# Altium PCB Buck_Converter_PCB_2.PcbDoc
Units mm, origin at the board's own origin, x right, y up, seen from the top; angles counter-clockwise.
Board outline 150 x 100 mm, 2 copper layers (Top Layer, Bottom Layer); 59 components, 30 nets, 152 pads, 0 vias.
Unrouted connection lines stored in the file: 104.
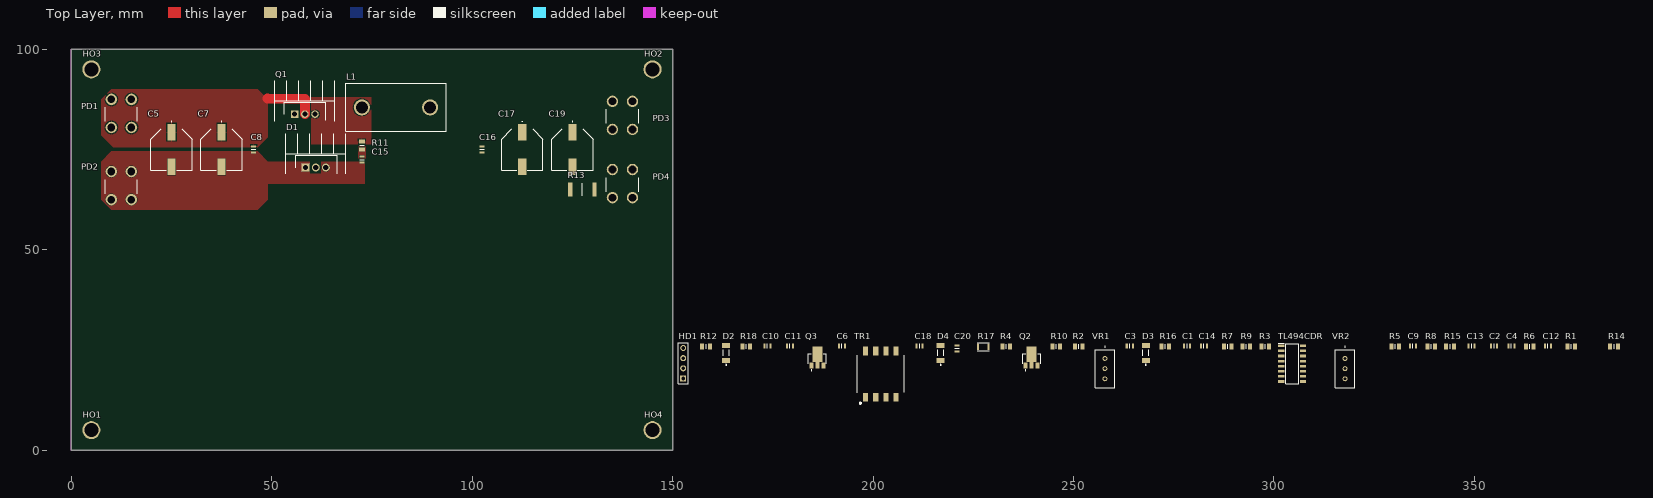
[diagram p0: Top Layer view]
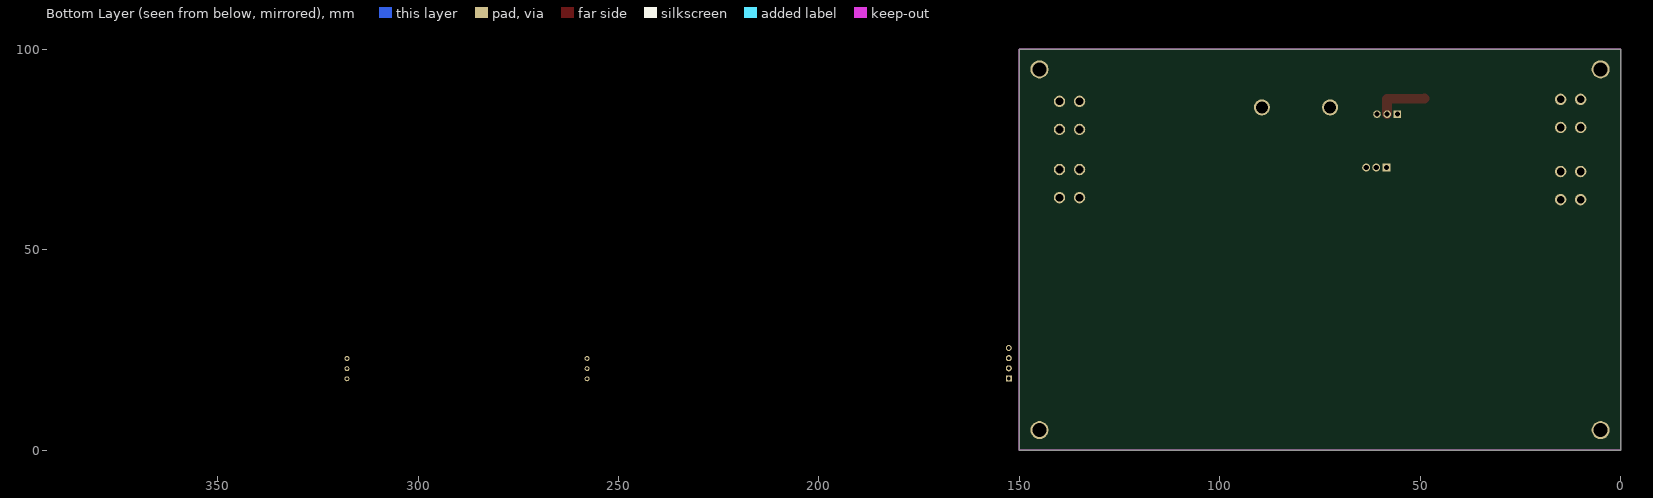
[diagram p1: Bottom Layer view, seen from below]

## Layer stack, top to bottom
Top Solder: solder mask 0.0102, Solder Resist, Dk 3.5
Top Layer: signal copper 0.0356
Dielectric 1: dielectric 0.32, FR-4, Dk 4.8
Bottom Layer: signal copper 0.0356
Bottom Solder: solder mask 0.0102, Solder Resist, Dk 3.5

## Board outline
0,0 150,0 150,100 0,100

## Design rules (kind name [scope] priority, off if disabled: settings)
Clearance [All] p1: gap=0.01
ComponentClearance [All] p1: gap=0.01 collisioncheckmode=3 verticalgap=0.254 showdistances=FALSE
PolygonConnect [All] p1: connectstyle=Direct reliefconductorwidth=0.254 reliefentries=4 polygonreliefangle="90 Angle" airgapwidth=0.254
RoutingVias [All] p1: holewidth=0.711 width=1.27 viastyle="Through Hole" minholewidth=0.711 minwidth=1.27 maxholewidth=0.711 maxwidth=1.27
SolderMaskExpansion [All] p1: expansion=0.102
UnpouredPolygon [All] p1: allowunpoured=TRUE allowshelved=TRUE
Width [All] p1: maxlimit=2.5 minlimit=0.254 preferedwidth=0.254
28 further rules are at their usual default settings.

## Components (designator, comment, footprint, x,y, rotation, side; value= is the part's Value field where it differs from the comment)
C1 "1uF" Capacitors_SMD_0805 278.345,25.973 r0 top
C2 "150pF" Capacitors_SMD_0805 354.945,25.973 r0 top
C3 "1nF" Capacitors_SMD_0805 264.045,25.973 r0 top
C4 "100nF" Capacitors_SMD_0805 359.245,25.973 r0 top
C5 "330uf" Capacitors_SMD_D10 25,75 r270 top
C6 "1uF" Capacitors_SMD_0805 192.246,25.973 r0 top
C7 "330uf" Capacitors_SMD_D10 37.5,75 r270 top
C8 "100nF" Capacitors_SMD_0805 45.5,75 r270 top
C9 "1nF" Capacitors_SMD_0805 334.645,25.973 r0 top
C10 "1uF" Capacitors_SMD_0805 173.646,25.973 r0 top
C11 "100nF" Capacitors_SMD_0805 179.246,25.973 r0 top
C12 "100nF" Capacitors_SMD_0805 368.345,25.973 r0 top
C13 "680pF" Capacitors_SMD_0805 349.345,25.973 r0 top
C14 "100nF" Capacitors_SMD_0805 282.545,25.973 r0 top
C15 "1nF" Capacitors_SMD_0805 72.5,72.5 r270 top
C16 "100nF" Capacitors_SMD_0805 102.5,75 r90 top
C17 "330uF" Capacitors_SMD_D10 112.5,75 r270 top
C18 "100nF" Capacitors_SMD_0805 211.646,25.973 r0 top
C19 "330uF" Capacitors_SMD_D10 125,75 r270 top
C20 "100nF" Capacitors_SMD_0805 220.946,25.373 r90 top
D1 "STPS20H100C" TO-220_Diode 61,70.5 r0 top
D2 "1N4148" 1N4148 163.346,24.273 r90 top
D3 "1N4148" 1N4148 268.045,24.273 r90 top
D4 "1N4148" 1N4148 216.846,24.273 r90 top
HD1 "Header 4" HDR1X4 152.646,17.873 r90 top
HO1 "HOLE" Hole 5,5 r0 top
HO2 "HOLE" Hole 145,95 r0 top
HO3 "HOLE" Hole 5,95 r0 top
HO4 "HOLE" Hole 145,5 r0 top
L1 "Inductor" Inductor 81,85.5 r0 top
PD1 "Terminal" Terminal 10,80.5 r0 top
PD2 "Terminal" Terminal 10,62.5 r0 top
PD3 "Terminal" Terminal 135,80 r0 top
PD4 "Terminal" Terminal 135,63 r0 top
Q1 "N-MOSFET" TO-220)N-MOSFET 58.26,83.8 r0 top
Q2 "2SCR552P" 2SCR552P 239.545,23.073 r0 top
Q3 "2SAR552P" 2SAR552P 186.146,23.073 r0 top
R1 "0R" RESISTOR_SMD_0805 374.145,25.873 r0 top
R2 "1K" RESISTOR_SMD_0805 251.345,25.873 r0 top
R3 "3K" RESISTOR_SMD_0805 297.845,25.873 r0 top
R4 "10K" RESISTOR_SMD_0805 233.245,25.873 r0 top
R5 "20K" RESISTOR_SMD_0805 330.245,25.873 r0 top
R6 "1K" RESISTOR_SMD_0805 363.845,25.873 r0 top
R7 "24K" RESISTOR_SMD_0805 288.445,25.873 r0 top
R8 "10K" RESISTOR_SMD_0805 339.245,25.873 r0 top
R9 "22R" RESISTOR_SMD_0805 293.145,25.873 r0 top
R10 "22R" RESISTOR_SMD_0805 245.745,25.873 r0 top
R11 "10R" RESISTOR_SMD_0805 72.5,76 r90 top
R12 "1K" RESISTOR_SMD_0805 158.346,25.873 r0 top
R13 "0R01" RESISTOR_SMD_2512 127.5,65 r0 top
R14 "15K" RESISTOR_SMD_0805 384.845,25.873 r0 top
R15 "1K5" RESISTOR_SMD_0805 343.945,25.873 r0 top
R16 "4R7" RESISTOR_SMD_0805 272.945,25.873 r0 top
R17 "4R7" RESISTOR_SMD_1206 227.545,25.773 r0 top
R18 "10K" RESISTOR_SMD_0805 168.346,25.873 r0 top
TL494CDR "TL494CDR" TL494CDR 304.545,21.573 r0 top
TR1 "B78307A2276A003" B78307A2276A003 201.946,18.973 r0 top
VR1 "5K" Baoter_3296 257.845,22.873 r90 top
VR2 "5K" Baoter_3296 317.745,22.873 r90 top

## Footprints (in the part's own frame and the unit in brackets; to place one, negate y for a bottom-side part, rotate by r counter-clockwise, add the part's x,y. Pads: shape width x height; smd on the part's side, far side on the other; paste and mask are expansions set on the pad)
1N4148 [mm]
  rect 1.25x2 smd: A(1.875,0) K(-1.875,0)
  silkscreen extent -3.12,-0.75 0.75,0.75, body extent -1.85,-0.8 1.85,0.8, height 1.6
2SAR552P [mm]
  rect 1x1.5 smd: 1(-1.5,-2) 3(1.5,-2)
  rect 1x1.7 smd: 2(0,-1.9)
  rect 2.5x3.8 smd: 2(0,0.85)
  silkscreen extent -2.25,-3.27 2.25,0.92, body extent -2.27,-2.27 2.27,1.73, height 1.6
2SCR552P [mm]
  rect 1x1.5 smd: 1(-1.5,-2) 3(1.5,-2)
  rect 1x1.7 smd: 2(0,-1.9)
  rect 2.5x3.8 smd: 2(0,0.85)
  silkscreen extent -2.25,-3.27 2.25,0.92, body extent -2.27,-2.27 2.27,1.73, height 1.6
B78307A2276A003 [mm]
  rect 1.3x2.21 smd: 1(-3.81,-5.77) 2(-1.27,-5.77) 3(1.27,-5.77) 4(3.81,-5.77) 5(3.81,5.77) 6(1.27,5.77) 7(-1.27,5.77) 8(-3.81,5.77)
  silkscreen extent -5.85,-7.3 5.85,4.65, body extent -5.94,-6.79 5.76,6.37, height 11.35
Baoter_3296 [mm]
  round 1.217 hole 0.71: 1(0,0) 2(-2.54,0) 3(-5.08,0)
  silkscreen extent -7.3,-2.41 3,2.42
Capacitors_SMD_0805 [mm]
  rect 0.5x1.25 smd: 1(-0.75,0) 2(0.75,0)
  silkscreen extent 0,-0.58 0,0.58
Capacitors_SMD_D10 [mm]
  rect 4.1x2 smd: 1(-4.35,0) 2(4.35,0)
  silkscreen extent -7,-5.15 5.15,5.15
HDR1X4 [mm] "Connector; Header; 4 Position"
  rect 1.5x1.5 hole 0.9: 1(0,0)
  round 1.5 hole 0.9: 2(2.54,0) 3(5.08,0) 4(7.62,0)
  silkscreen extent -1.27,-1.27 8.89,1.27
Hole [mm]
  round 4.5 hole 3.5: 1(0,0)
Inductor [mm]
  round 4 hole 3: 1(-8.5,0) 2(8.5,0)
  silkscreen extent -12.5,-6 12.5,6
RESISTOR_SMD_0805 [mm]
  rect 1x1.45 smd: 1(-0.95,0) 2(0.95,0)
  silkscreen extent 0,-0.53 0,0.53
RESISTOR_SMD_1206 [mm]
  rect 0.5x1.6 smd: 1(-1.3,0) 2(1.3,0)
  silkscreen extent -1.6,-1 1.5,1
RESISTOR_SMD_2512 [mm]
  rect 1.05x3.45 smd: 1(-3.05,0) 2(3.05,0)
  silkscreen extent 0,-1.55 0,1.55
Terminal [mm]
  round 2.85 hole 1.9: 1(0,0) 1(0,7) 1(5,0) 1(5,7)
  silkscreen extent -1.5,1.5 6.5,5
TL494CDR [mm]
  rect 1.525x0.65 smd: 1(-2.712,4.445) 2(-2.712,3.175) 3(-2.712,1.905) 4(-2.712,0.635) 5(-2.712,-0.635) 6(-2.712,-1.905) 7(-2.712,-3.175) 8(-2.712,-4.445) 9(2.712,-4.445) 10(2.712,-3.175) 11(2.712,-1.905) 12(2.712,-0.635) 13(2.712,0.635) 14(2.712,1.905) 15(2.712,3.175) 16(2.712,4.445)
  silkscreen extent -3.47,-4.95 1.6,5.12
TO-220)N-MOSFET [mm]
  rect 1.875x1.875 / inner round 1.875 / far side rect 1.875x1.875 hole 1.25: 1(-2.54,0)
  round 1.875 hole 1.25: 2(0,0) 3(2.54,0)
  silkscreen extent -7.5,-1.7 7.5,8.3
TO-220_Diode [mm]
  rect 1.98x1.98 / inner round 1.98 / far side rect 1.98x1.98 hole 1.32: A1(-2.55,0)
  round 1.98 hole 1.32: A2(2.5,0) K(0,0)
  silkscreen extent -7.55,-1.6 7.45,8.4

## Part data
C1: library part C1, "SMD_0805"
C2: library part C2, "SMD_0805"
C3: library part C3, "SMD_0805"
C4: library part C4, "SMD_0805"
C5: library part C5, "SMD_D10"
C6: library part C6, "SMD_0805"
C7: library part C7, "SMD_D10"
C8: library part C8, "SMD_0805"
C9: library part C9, "SMD_0805"
C10: library part C10, "SMD_0805"
C11: library part C11, "SMD_0805"
C12: library part C12, "SMD_0805"
C13: library part C13, "SMD_0805"
C14: library part C14, "SMD_0805"
C15: library part C15, "SMD_0805"
C16: library part C16, "SMD_0805"
C17: library part C17, "SMD_D10"
C18: library part C18, "SMD_0805"
C19: library part C19, "SMD_D10"
C20: library part C20, "SMD_0805"
D1: library part D1, "Schottky"
D2: library part D2, "Diode"
D3: library part D3, "Diode"
D4: library part D4, "Diode"
HD1: "Header, 4-Pin"
HO1: library part HO1
HO2: library part HO2
HO3: library part HO3
HO4: library part HO4
L1: library part L1
PD1: library part PD1
PD2: library part PD2
PD3: library part PD3
PD4: library part PD4
Q1: library part Q1
Q2: library part Q2, "NPN-BJT"
Q3: library part Q3, "PNP-BJT"
R1: library part R1, "SMD_0805"
R2: library part R2, "SMD_0805"
R3: library part R3, "SMD_0805"
R4: library part R4, "SMD_0805"
R5: library part R5, "SMD_0805"
R6: library part R6, "SMD_0805"
R7: library part R7, "SMD_0805"
R8: library part R8, "SMD_0805"
R9: library part R9, "SMD_0805"
R10: library part R10, "SMD_0805"
R11: library part R11, "SMD_0805"
R12: library part R12, "SMD_0805"
R13: library part R13, "SMD_2512"
R14: library part R14, "SMD_0805"
R15: library part R15, "SMD_0805"
R16: library part R16, "SMD_0805"
R17: library part R17, "SMD_1206"
R18: library part R18, "SMD_0805"
TL494CDR: "PWM_controller"
TR1: library part TR1, "SMDTransformers"
VR1: library part VR1, "Baoter_3296"
VR2: library part VR2, "Baoter_3296"

## Nets (pads, with @x,y where several pads share a name; then routed paths per layer and width w, separated by ;. In a path a pad name is that pad's centre, name@x,y a point inside that pad or via, vN(x,y) a via of type N, cw(c..) or ccw(c..) an arc to the next point about the centre after c; other vN are vias at no path point)
5V: C1.2 C14.1 R3.1 R7.1 TL494CDR.13 TL494CDR.14
12V: C6.2 C10.2 C11.2 HD1.1 Q2.2 TL494CDR.8 TL494CDR.11 TL494CDR.12
AG: C3.1 C6.1 C9.1 C10.1 C11.1 C14.2 HD1.2 HD1.3 Q3.2 R1.2 R2.1 R4.1 R12.1 TL494CDR.7 TR1.3 VR1.2 VR1.3 VR2.2 VR2.3
CS: PD4.1 R6.1 R13.2
GATE: Q1.1 R16.2 R17.2 R18.2
NetC1_1: C1.1 R2.2 TL494CDR.4
NetC2_1: C2.1 R3.2 R5.2 TL494CDR.2
NetC2_2: C2.2 C4.2 C12.2 C13.1 TL494CDR.3
NetC3_2: C3.2 TL494CDR.5
NetC4_1: C4.1 R5.1
NetC5_1: C5.1 C7.1 C8.1 PD1.1 Q1.2 | length 13.1
  Top Layer w2.5: 48.94,87.707 58.2,87.6 58.26,87.54 Q1.2
NetC9_2: C9.2 R6.2 TL494CDR.16
NetC12_1: C12.1 R8.2
NetC13_2: C13.2 R7.2 R8.1 R9.1 TL494CDR.15
NetC15_1: C15.1 R11.1
NetC16_2: C16.2 C17.1 C19.1 L1.2 PD3.1 R14.2
NetC18_1: C18.1 Q2.3 Q3.3
NetC18_2: C18.2 TR1.2
NetC20_1: C20.1 TR1.8
NetC20_2: C20.2 D2.K D3.K D4.A
NetD3_A: D3.A R16.1
NetD4_K: D4.K R17.1
NetQ2_1: Q2.1 Q3.1 R10.2 R12.2
NetR4_2: R4.2 TL494CDR.6
NetR9_2: R9.2 VR1.1
NetR10_1: R10.1 TL494CDR.9 TL494CDR.10
NetR15_1: R15.1 VR2.1
PG: C5.2 C7.2 C8.2 C15.2 C16.1 C17.2 C19.2 D1.A1 D1.A2 PD2.1 R1.1 R13.1
REF: D1.K D2.A L1.1 Q1.3 R11.2 R18.1 TR1.5
VFB: R14.1 R15.2 TL494CDR.1
pads on no net: HD1.4 HO1.1 HO2.1 HO3.1 HO4.1 TR1.1 TR1.4 TR1.6 TR1.7

## Polygon pours and split planes (outlines as drawn)
NetC5_1 on Top Layer "Top Layer-No Net" (solid, pour order 10): 10,90 7.5,87.5 7.5,79.5 7.5,78.5 10.5,75.5 7.5,78.5 10.5,75.5 11.5,75.5 41.5,75.5 46.5,75.5 49,78 49,83.5 49,87.5 46.5,90 42.5,90
PG on Top Layer "Top Layer-No Net" (solid, pour order 12): 46.5,74.5 49,72 49,62.5 46.5,60 10,60 7.5,62.5 7.5,72 10,74.5
PG on Top Layer "Top Layer-No Net" (solid, pour order 16): 73.19,72 49,72 49,66.4 73.19,66.4
REF on Top Layer "REF_L01_P018" (solid, pour order 18): 74.8,76.3 74.8,88 59.9,88 59.9,76.3
NetC15_1 on Top Layer "Top Layer-No Net" (solid, pour order 20): 71.6,72.8 73.4,72.8 73.4,75.7 71.6,75.7

## Keep-outs
Keep-Out Layer:
  the board outline again, w0.254

## Other copper
Top Layer:
  pour cut-out: 59.5,71.9 59.6,72 62.4,72 62.4,69 59.5,69